# EAGLE board 13757_Sparkfun_Adjustable_LiPo_Charger.panel_v10 (EAGLE 7.5.0), part 1 of 3
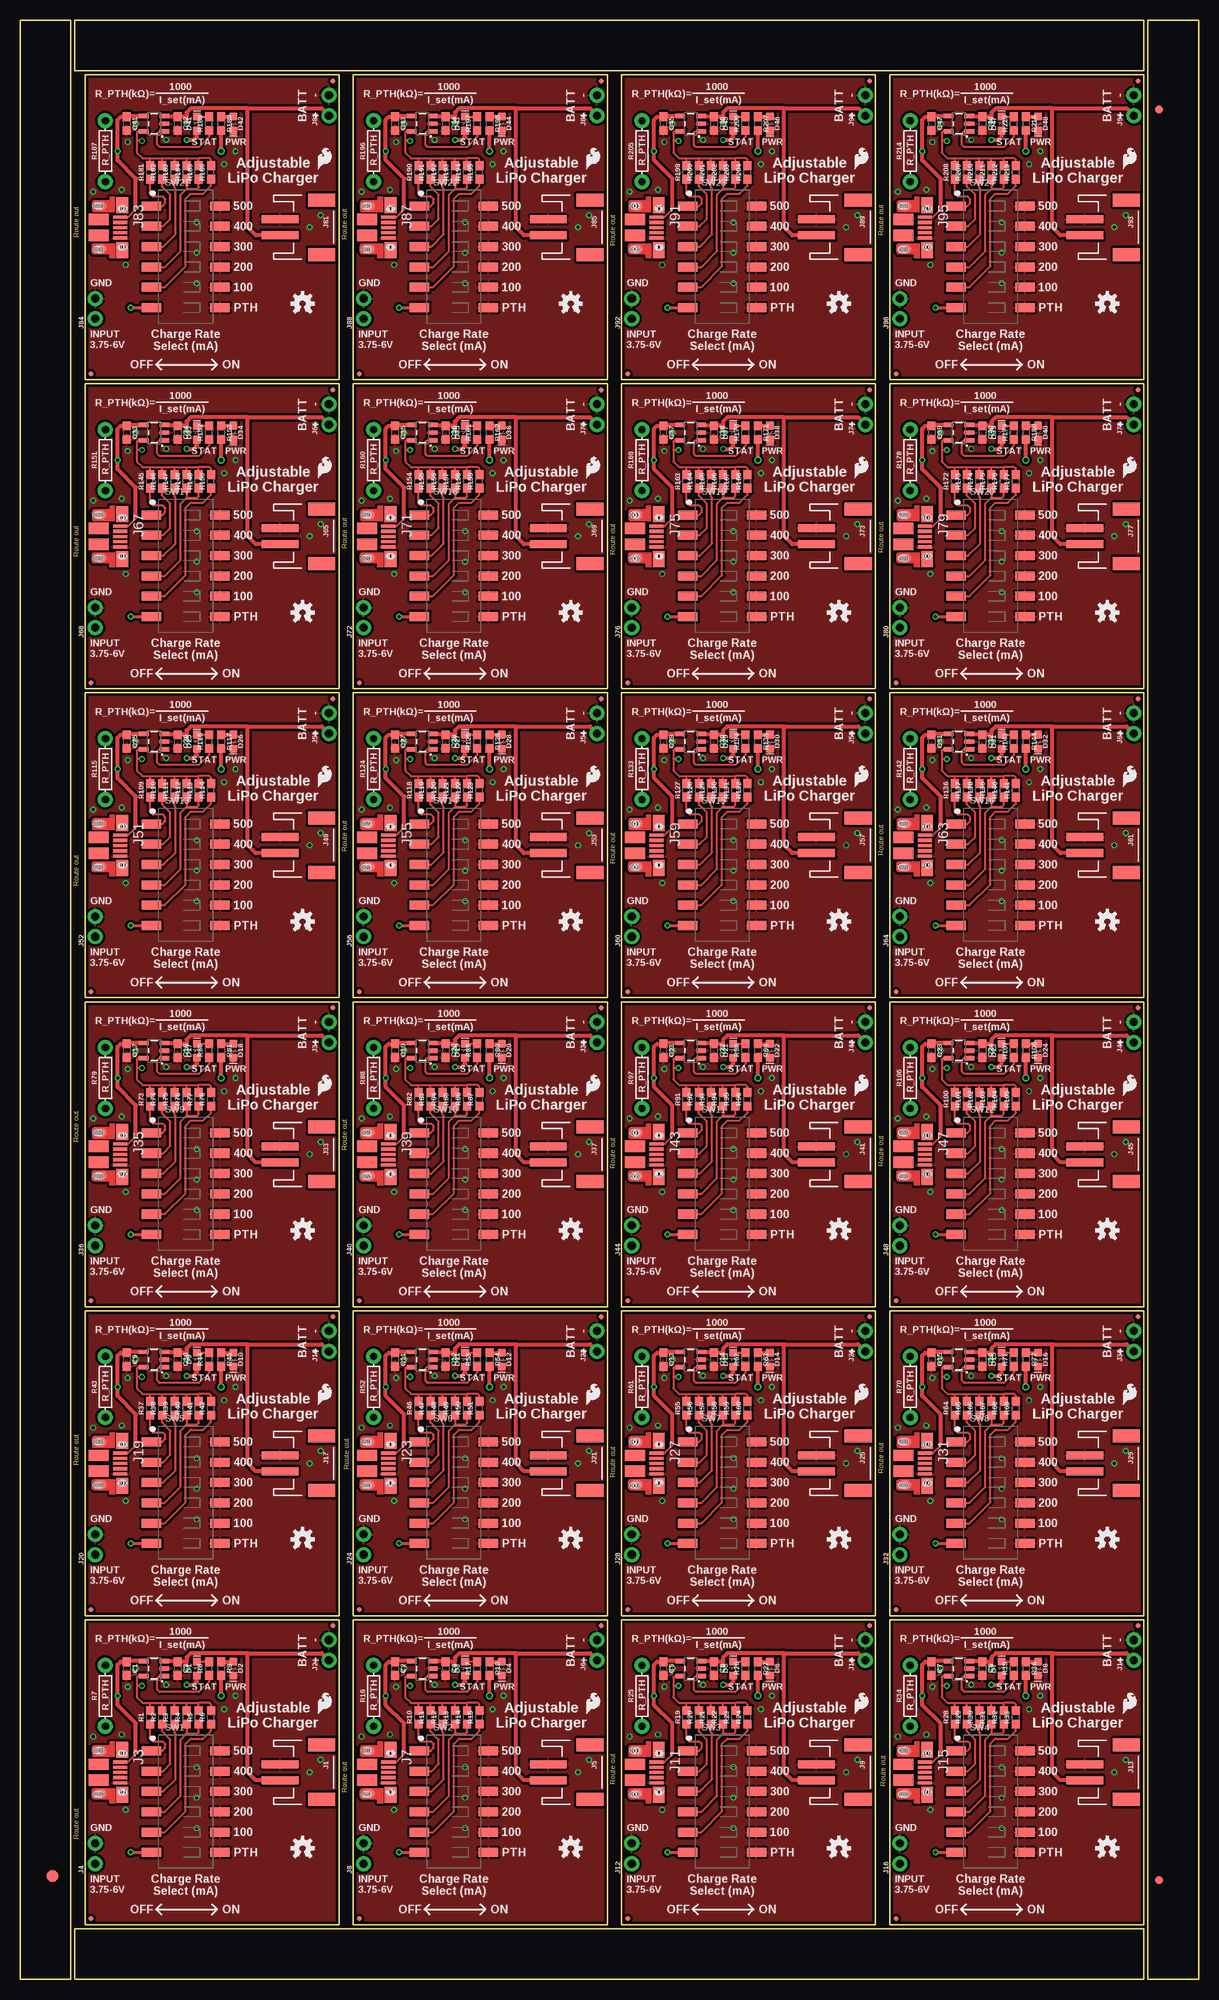
[diagram p0: board, top side]
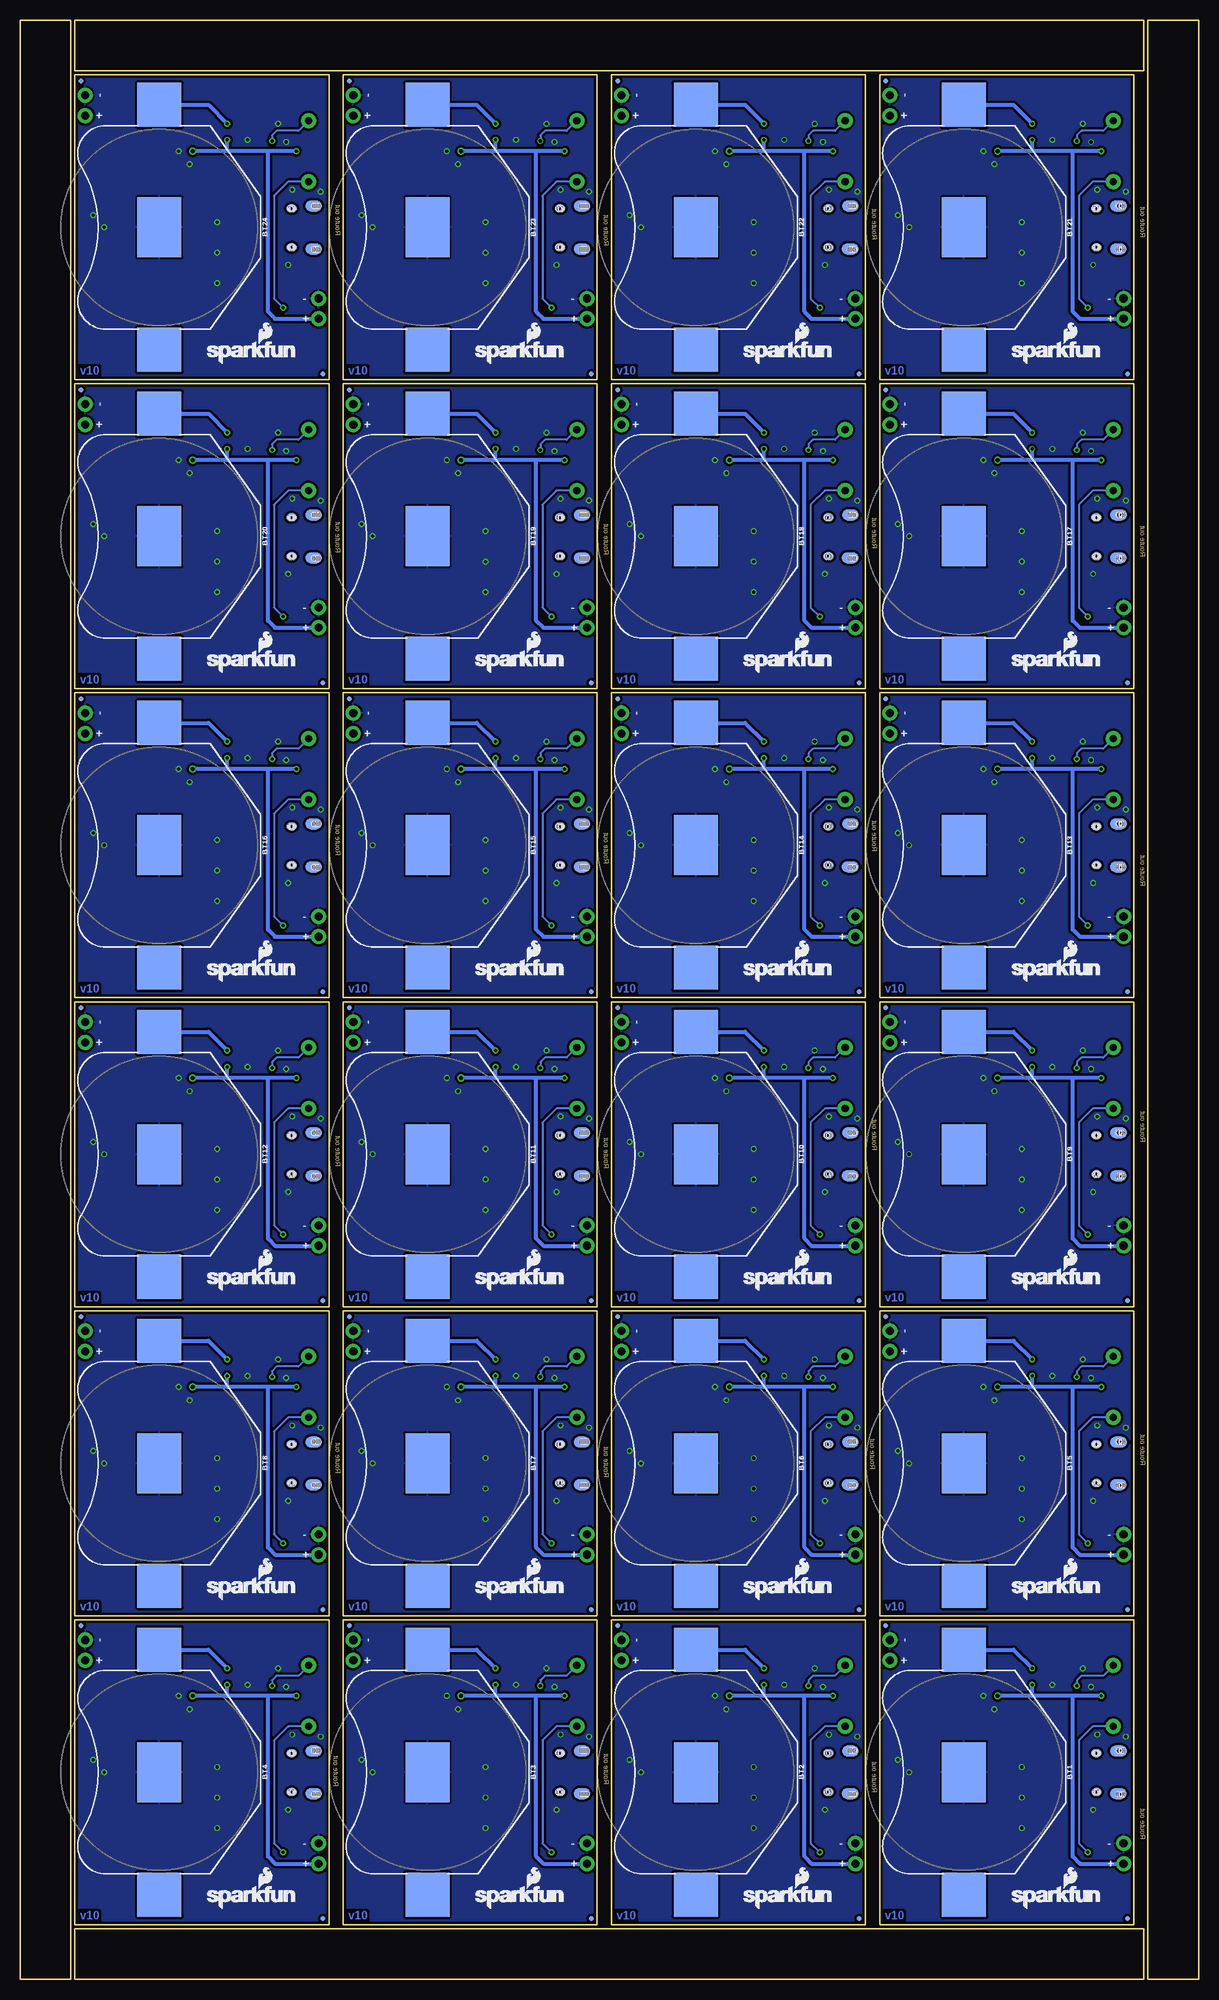
[diagram p1: board, bottom side, seen from below]

Size 147.32 x 244.86 mm. Coordinates in mm from the lower left corner, seen from the top.
Outline: 6.35,79.25 6.35,0 0,0 0,29.72
Outline: 0,27.18 0,244.86 6.35,244.86 6.35,76.71
Outline: 79.25,0 6.86,0 6.86,6.35 29.72,6.35
Outline: 27.18,6.35 140.46,6.35 140.46,0 76.71,0
Outline: 68.07,244.86 140.46,244.86 140.46,238.51 117.6,238.51
Outline: 120.14,238.51 6.86,238.51 6.86,244.86 70.61,244.86
Outline: 140.97,172.47 140.97,244.86 147.32,244.86 147.32,222
Outline: 147.32,224.54 147.32,0 140.97,0 140.97,175.01
Outline: 8.13,6.86 39.88,6.86 39.88,44.96 8.13,44.96 8.13,6.86
Outline: 41.66,6.86 73.41,6.86 73.41,44.96 41.66,44.96 41.66,6.86
Outline: 75.18,6.86 106.93,6.86 106.93,44.96 75.18,44.96 75.18,6.86
Outline: 108.71,6.86 140.46,6.86 140.46,44.96 108.71,44.96 108.71,6.86
Outline: 8.13,45.47 39.88,45.47 39.88,83.57 8.13,83.57 8.13,45.47
Outline: 41.66,45.47 73.41,45.47 73.41,83.57 41.66,83.57 41.66,45.47
Outline: 75.18,45.47 106.93,45.47 106.93,83.57 75.18,83.57 75.18,45.47
Outline: 108.71,45.47 140.46,45.47 140.46,83.57 108.71,83.57 108.71,45.47
Outline: 8.13,84.07 39.88,84.07 39.88,122.17 8.13,122.17 8.13,84.07
Outline: 41.66,84.07 73.41,84.07 73.41,122.17 41.66,122.17 41.66,84.07
Outline: 75.18,84.07 106.93,84.07 106.93,122.17 75.18,122.17 75.18,84.07
Outline: 108.71,84.07 140.46,84.07 140.46,122.17 108.71,122.17 108.71,84.07
Outline: 8.13,122.68 39.88,122.68 39.88,160.78 8.13,160.78 8.13,122.68
Outline: 41.66,122.68 73.41,122.68 73.41,160.78 41.66,160.78 41.66,122.68
Outline: 75.18,122.68 106.93,122.68 106.93,160.78 75.18,160.78 75.18,122.68
Outline: 108.71,122.68 140.46,122.68 140.46,160.78 108.71,160.78 108.71,122.68
Outline: 8.13,161.29 39.88,161.29 39.88,199.39 8.13,199.39 8.13,161.29
Outline: 41.66,161.29 73.41,161.29 73.41,199.39 41.66,199.39 41.66,161.29
Outline: 75.18,161.29 106.93,161.29 106.93,199.39 75.18,199.39 75.18,161.29
Outline: 108.71,161.29 140.46,161.29 140.46,199.39 108.71,199.39 108.71,161.29
Outline: 8.13,199.9 39.88,199.9 39.88,238 8.13,238 8.13,199.9
Outline: 41.66,199.9 73.41,199.9 73.41,238 41.66,238 41.66,199.9
Outline: 75.18,199.9 106.93,199.9 106.93,238 75.18,238 75.18,199.9
Outline: 108.71,199.9 140.46,199.9 140.46,238 108.71,238 108.71,199.9
Copper layers (1*16): Top 0.035mm / dielectric 1.5mm / Bottom 0.035mm
Design rules "SparkFun-2-layer-TIGHT": minimum track width 7mil, minimum drill 15mil, track to track 7mil, track to pad 7mil, pad to pad 7mil, via to via 7mil, smd to smd 7mil, copper to edge 7mil, drill to drill 7mil, minimum pad ring 7mil, minimum via ring 7mil, stop-mask expansion 4mil, vias tented up to drill 25mil, thermal gap 10mil

## Footprints (pad centres in the part's own frame; a part is rotated, then mirrored left to right if it is on the bottom)
BATTCON_24.5MM_SMD = smd 5.5 x 5.5: 1 -15.3,0; 3 15.3,0 | smd 7.5 x 5.5: 2 0,0
0603 = smd 1.1 x 1: 1 -0.85,0; 2 0.85,0
LED-0603 = smd 1 x 1: A -0.877,0; C 0.877,0
FIDUCIAL-1.5X3 = smd 1.5 x 1.5: 1 0,0
FIDUCIAL-1X2 = smd 1 x 1: 1 0,0
FIDUCIAL-MICRO = smd 0.635 x 0.635: 1 0,0
JST-2-SMD = smd 1 x 4.6: 1 -1,-3.7; 2 1,-3.7 | smd 1.6 x 3.4: NC1 -3.4,1.5; NC2 3.4,1.5
1X02_NO_SILK = drill 1.016 pad 1.88: 1 0,0; 2 2.54,0
USB-MICROB-PTH = smd 0.4 x 1.75: D+ 0.031,1.331; D- -0.619,1.331; GND 1.331,1.331; ID 0.681,1.331; VBUS -1.269,1.331 | smd 1.4 x 2.1 bottom: P$1 2.701,-1.142; P$3 -2.659,-1.144 | smd 1 x 1.3: P$2 2.487,1.594; P$6 -2.368,1.604 | smd 1 x 1.3 bottom: P$4 -2.368,1.604; P$10 2.481,1.598 | smd 1.1 x 1.5: P$8 2.701,-1.142; P$12 -2.659,-1.144 | smd 2 x 1.46: SHEILD2 2.831,1.606; SHIELD -2.794,1.606 | smd 1.425 x 2.5: SHIELD3 -0.979,-1.349; SHIELD4 0.996,-1.352 | hole 0.7: -2.693,-1.134; -2.693,-1.3; -2.694,-1.499; -2.694,-1.664; 2.768,-1.134; 2.767,-1.303; 2.766,-1.496; 2.766,-1.664 | hole 0.66: -2.359,1.821; -2.349,1.691; -2.359,1.541; -2.354,1.432; 2.481,1.821; 2.491,1.691; 2.481,1.541; 2.486,1.432
AXIAL-0.3 = drill 0.9 pad 1.88: P$1 -3.81,0; P$2 3.81,0
DIPSWITCH-06-SMD = smd 1.13 x 2.44: 1 -6.35,-4.3; 2 -3.81,-4.3; 3 -1.27,-4.3; 4 1.27,-4.3; 5 3.81,-4.3; 6 6.35,-4.3; 7 6.35,4.3; 8 3.81,4.3; 9 1.27,4.3; 10 -1.27,4.3; 11 -3.81,4.3; 12 -6.35,4.3
SOT23-5 = smd 0.55 x 1.2: 1 -0.95,-1.3; 2 0,-1.3; 3 0.95,-1.3; 4 0.95,1.3; 5 -0.95,1.3

## Placement (x,y rotation side)
BT1  [BATTCON_24.5MM_SMD]  29.34,25.91 90 bottom
BT2  [BATTCON_24.5MM_SMD]  62.87,25.91 90 bottom
BT3  [BATTCON_24.5MM_SMD]  96.39,25.91 90 bottom
BT4  [BATTCON_24.5MM_SMD]  129.92,25.91 90 bottom
BT5  [BATTCON_24.5MM_SMD]  29.34,64.52 90 bottom
BT6  [BATTCON_24.5MM_SMD]  62.87,64.52 90 bottom
BT7  [BATTCON_24.5MM_SMD]  96.39,64.52 90 bottom
BT8  [BATTCON_24.5MM_SMD]  129.92,64.52 90 bottom
BT9  [BATTCON_24.5MM_SMD]  29.34,103.12 90 bottom
BT10  [BATTCON_24.5MM_SMD]  62.87,103.12 90 bottom
BT11  [BATTCON_24.5MM_SMD]  96.39,103.12 90 bottom
BT12  [BATTCON_24.5MM_SMD]  129.92,103.12 90 bottom
BT13  [BATTCON_24.5MM_SMD]  29.34,141.73 90 bottom
BT14  [BATTCON_24.5MM_SMD]  62.87,141.73 90 bottom
BT15  [BATTCON_24.5MM_SMD]  96.39,141.73 90 bottom
BT16  [BATTCON_24.5MM_SMD]  129.92,141.73 90 bottom
BT17  [BATTCON_24.5MM_SMD]  29.34,180.34 90 bottom
BT18  [BATTCON_24.5MM_SMD]  62.87,180.34 90 bottom
BT19  [BATTCON_24.5MM_SMD]  96.39,180.34 90 bottom
BT20  [BATTCON_24.5MM_SMD]  129.92,180.34 90 bottom
BT21  [BATTCON_24.5MM_SMD]  29.34,218.95 90 bottom
BT22  [BATTCON_24.5MM_SMD]  62.87,218.95 90 bottom
BT23  [BATTCON_24.5MM_SMD]  96.39,218.95 90 bottom
BT24  [BATTCON_24.5MM_SMD]  129.92,218.95 90 bottom
C1  4.7uF  [0603]  13.34,38.86 270 top
C2  4.7uF  [0603]  46.86,38.86 270 top
C3  4.7uF  [0603]  19.68,38.86 270 top
C4  4.7uF  [0603]  53.21,38.86 270 top
C5  4.7uF  [0603]  80.39,38.86 270 top
C6  4.7uF  [0603]  86.74,38.86 270 top
C7  4.7uF  [0603]  113.92,38.86 270 top
C8  4.7uF  [0603]  120.27,38.86 270 top
C9  4.7uF  [0603]  13.34,77.47 270 top
C10  4.7uF  [0603]  19.68,77.47 270 top
C11  4.7uF  [0603]  46.86,77.47 270 top
C12  4.7uF  [0603]  53.21,77.47 270 top
C13  4.7uF  [0603]  80.39,77.47 270 top
C14  4.7uF  [0603]  86.74,77.47 270 top
C15  4.7uF  [0603]  113.92,77.47 270 top
C16  4.7uF  [0603]  120.27,77.47 270 top
C17  4.7uF  [0603]  13.34,116.08 270 top
C18  4.7uF  [0603]  19.68,116.08 270 top
C19  4.7uF  [0603]  46.86,116.08 270 top
C20  4.7uF  [0603]  53.21,116.08 270 top
C21  4.7uF  [0603]  80.39,116.08 270 top
C22  4.7uF  [0603]  86.74,116.08 270 top
C23  4.7uF  [0603]  113.92,116.08 270 top
C24  4.7uF  [0603]  120.27,116.08 270 top
C25  4.7uF  [0603]  13.34,154.69 270 top
C26  4.7uF  [0603]  19.68,154.69 270 top
C27  4.7uF  [0603]  46.86,154.69 270 top
C28  4.7uF  [0603]  53.21,154.69 270 top
C29  4.7uF  [0603]  80.39,154.69 270 top
C30  4.7uF  [0603]  86.74,154.69 270 top
C31  4.7uF  [0603]  113.92,154.69 270 top
C32  4.7uF  [0603]  120.27,154.69 270 top
C33  4.7uF  [0603]  13.34,193.29 270 top
C34  4.7uF  [0603]  19.68,193.29 270 top
C35  4.7uF  [0603]  46.86,193.29 270 top
C36  4.7uF  [0603]  53.21,193.29 270 top
C37  4.7uF  [0603]  80.39,193.29 270 top
C38  4.7uF  [0603]  86.74,193.29 270 top
C39  4.7uF  [0603]  113.92,193.29 270 top
C40  4.7uF  [0603]  120.27,193.29 270 top
C41  4.7uF  [0603]  13.34,231.9 270 top
C42  4.7uF  [0603]  19.68,231.9 270 top
C43  4.7uF  [0603]  46.86,231.9 270 top
C44  4.7uF  [0603]  53.21,231.9 270 top
C45  4.7uF  [0603]  80.39,231.9 270 top
C46  4.7uF  [0603]  86.74,231.9 270 top
C47  4.7uF  [0603]  113.92,231.9 270 top
C48  4.7uF  [0603]  120.27,231.9 270 top
D1  BLUE  [LED-0603]  22.1,38.86 90 top
D2  RED  [LED-0603]  26.67,38.86 270 top
D3  BLUE  [LED-0603]  55.63,38.86 90 top
D4  RED  [LED-0603]  60.2,38.86 270 top
D5  BLUE  [LED-0603]  89.15,38.86 90 top
D6  RED  [LED-0603]  93.73,38.86 270 top
D7  BLUE  [LED-0603]  122.68,38.86 90 top
D8  RED  [LED-0603]  127.25,38.86 270 top
D9  BLUE  [LED-0603]  22.1,77.47 90 top
D10  RED  [LED-0603]  26.67,77.47 270 top
D11  BLUE  [LED-0603]  55.63,77.47 90 top
D12  RED  [LED-0603]  60.2,77.47 270 top
D13  BLUE  [LED-0603]  89.15,77.47 90 top
D14  RED  [LED-0603]  93.73,77.47 270 top
D15  BLUE  [LED-0603]  122.68,77.47 90 top
D16  RED  [LED-0603]  127.25,77.47 270 top
D17  BLUE  [LED-0603]  22.1,116.08 90 top
D18  RED  [LED-0603]  26.67,116.08 270 top
D19  BLUE  [LED-0603]  55.63,116.08 90 top
D20  RED  [LED-0603]  60.2,116.08 270 top
D21  BLUE  [LED-0603]  89.15,116.08 90 top
D22  RED  [LED-0603]  93.73,116.08 270 top
D23  BLUE  [LED-0603]  122.68,116.08 90 top
D24  RED  [LED-0603]  127.25,116.08 270 top
D25  BLUE  [LED-0603]  22.1,154.69 90 top
D26  RED  [LED-0603]  26.67,154.69 270 top
D27  BLUE  [LED-0603]  55.63,154.69 90 top
D28  RED  [LED-0603]  60.2,154.69 270 top
D29  BLUE  [LED-0603]  89.15,154.69 90 top
D30  RED  [LED-0603]  93.73,154.69 270 top
D31  BLUE  [LED-0603]  122.68,154.69 90 top
D32  RED  [LED-0603]  127.25,154.69 270 top
D33  BLUE  [LED-0603]  22.1,193.29 90 top
D34  RED  [LED-0603]  26.67,193.29 270 top
D35  BLUE  [LED-0603]  55.63,193.29 90 top
D36  RED  [LED-0603]  60.2,193.29 270 top
D37  BLUE  [LED-0603]  89.15,193.29 90 top
D38  RED  [LED-0603]  93.73,193.29 270 top
D39  BLUE  [LED-0603]  122.68,193.29 90 top
D40  RED  [LED-0603]  127.25,193.29 270 top
D41  BLUE  [LED-0603]  22.1,231.9 90 top
D42  RED  [LED-0603]  26.67,231.9 270 top
D43  BLUE  [LED-0603]  55.63,231.9 90 top
D44  RED  [LED-0603]  60.2,231.9 270 top
D45  BLUE  [LED-0603]  89.15,231.9 90 top
D46  RED  [LED-0603]  93.73,231.9 270 top
D47  BLUE  [LED-0603]  122.68,231.9 90 top
D48  RED  [LED-0603]  127.25,231.9 270 top
E$1  [FIDUCIAL-1.5X3]  4.06,12.95 0 top
E$7  [FIDUCIAL-1X2]  142.37,233.68 180 top
E$8  [FIDUCIAL-1X2]  142.37,12.45 0 top
FD1  FIDUCIALUFIDUCIAL  [FIDUCIAL-MICRO]  39.12,44.2 0 top
FD2  FIDUCIALUFIDUCIAL  [FIDUCIAL-MICRO]  8.89,7.62 0 top
FD3  FIDUCIALUFIDUCIAL  [FIDUCIAL-MICRO]  8.89,7.62 0 bottom
FD4  FIDUCIALUFIDUCIAL  [FIDUCIAL-MICRO]  39.12,44.2 0 bottom
FD5  FIDUCIALUFIDUCIAL  [FIDUCIAL-MICRO]  72.64,44.2 0 top
FD6  FIDUCIALUFIDUCIAL  [FIDUCIAL-MICRO]  42.42,7.62 0 top
FD7  FIDUCIALUFIDUCIAL  [FIDUCIAL-MICRO]  42.42,7.62 0 bottom
FD8  FIDUCIALUFIDUCIAL  [FIDUCIAL-MICRO]  72.64,44.2 0 bottom
FD9  FIDUCIALUFIDUCIAL  [FIDUCIAL-MICRO]  106.17,44.2 0 top
FD10  FIDUCIALUFIDUCIAL  [FIDUCIAL-MICRO]  75.95,7.62 0 top
FD11  FIDUCIALUFIDUCIAL  [FIDUCIAL-MICRO]  75.95,7.62 0 bottom
FD12  FIDUCIALUFIDUCIAL  [FIDUCIAL-MICRO]  106.17,44.2 0 bottom
FD13  FIDUCIALUFIDUCIAL  [FIDUCIAL-MICRO]  139.7,44.2 0 top
FD14  FIDUCIALUFIDUCIAL  [FIDUCIAL-MICRO]  109.47,7.62 0 top
FD15  FIDUCIALUFIDUCIAL  [FIDUCIAL-MICRO]  109.47,7.62 0 bottom
FD16  FIDUCIALUFIDUCIAL  [FIDUCIAL-MICRO]  139.7,44.2 0 bottom
FD17  FIDUCIALUFIDUCIAL  [FIDUCIAL-MICRO]  39.12,82.8 0 top
FD18  FIDUCIALUFIDUCIAL  [FIDUCIAL-MICRO]  8.89,46.23 0 top
FD19  FIDUCIALUFIDUCIAL  [FIDUCIAL-MICRO]  8.89,46.23 0 bottom
FD20  FIDUCIALUFIDUCIAL  [FIDUCIAL-MICRO]  39.12,82.8 0 bottom
FD21  FIDUCIALUFIDUCIAL  [FIDUCIAL-MICRO]  72.64,82.8 0 top
FD22  FIDUCIALUFIDUCIAL  [FIDUCIAL-MICRO]  42.42,46.23 0 top
FD23  FIDUCIALUFIDUCIAL  [FIDUCIAL-MICRO]  42.42,46.23 0 bottom
FD24  FIDUCIALUFIDUCIAL  [FIDUCIAL-MICRO]  72.64,82.8 0 bottom
FD25  FIDUCIALUFIDUCIAL  [FIDUCIAL-MICRO]  106.17,82.8 0 top
FD26  FIDUCIALUFIDUCIAL  [FIDUCIAL-MICRO]  75.95,46.23 0 top
FD27  FIDUCIALUFIDUCIAL  [FIDUCIAL-MICRO]  75.95,46.23 0 bottom
FD28  FIDUCIALUFIDUCIAL  [FIDUCIAL-MICRO]  106.17,82.8 0 bottom
FD29  FIDUCIALUFIDUCIAL  [FIDUCIAL-MICRO]  139.7,82.8 0 top
FD30  FIDUCIALUFIDUCIAL  [FIDUCIAL-MICRO]  109.47,46.23 0 top
FD31  FIDUCIALUFIDUCIAL  [FIDUCIAL-MICRO]  109.47,46.23 0 bottom
FD32  FIDUCIALUFIDUCIAL  [FIDUCIAL-MICRO]  139.7,82.8 0 bottom
FD33  FIDUCIALUFIDUCIAL  [FIDUCIAL-MICRO]  39.12,121.41 0 top
FD34  FIDUCIALUFIDUCIAL  [FIDUCIAL-MICRO]  8.89,84.84 0 top
FD35  FIDUCIALUFIDUCIAL  [FIDUCIAL-MICRO]  8.89,84.84 0 bottom
FD36  FIDUCIALUFIDUCIAL  [FIDUCIAL-MICRO]  39.12,121.41 0 bottom
FD37  FIDUCIALUFIDUCIAL  [FIDUCIAL-MICRO]  72.64,121.41 0 top
FD38  FIDUCIALUFIDUCIAL  [FIDUCIAL-MICRO]  42.42,84.84 0 top
FD39  FIDUCIALUFIDUCIAL  [FIDUCIAL-MICRO]  42.42,84.84 0 bottom
FD40  FIDUCIALUFIDUCIAL  [FIDUCIAL-MICRO]  72.64,121.41 0 bottom
FD41  FIDUCIALUFIDUCIAL  [FIDUCIAL-MICRO]  106.17,121.41 0 top
FD42  FIDUCIALUFIDUCIAL  [FIDUCIAL-MICRO]  75.95,84.84 0 top
FD43  FIDUCIALUFIDUCIAL  [FIDUCIAL-MICRO]  75.95,84.84 0 bottom
FD44  FIDUCIALUFIDUCIAL  [FIDUCIAL-MICRO]  106.17,121.41 0 bottom
FD45  FIDUCIALUFIDUCIAL  [FIDUCIAL-MICRO]  139.7,121.41 0 top
FD46  FIDUCIALUFIDUCIAL  [FIDUCIAL-MICRO]  109.47,84.84 0 top
FD47  FIDUCIALUFIDUCIAL  [FIDUCIAL-MICRO]  109.47,84.84 0 bottom
FD48  FIDUCIALUFIDUCIAL  [FIDUCIAL-MICRO]  139.7,121.41 0 bottom
FD49  FIDUCIALUFIDUCIAL  [FIDUCIAL-MICRO]  39.12,160.02 0 top
FD50  FIDUCIALUFIDUCIAL  [FIDUCIAL-MICRO]  8.89,123.44 0 top
FD51  FIDUCIALUFIDUCIAL  [FIDUCIAL-MICRO]  8.89,123.44 0 bottom
FD52  FIDUCIALUFIDUCIAL  [FIDUCIAL-MICRO]  39.12,160.02 0 bottom
FD53  FIDUCIALUFIDUCIAL  [FIDUCIAL-MICRO]  72.64,160.02 0 top
FD54  FIDUCIALUFIDUCIAL  [FIDUCIAL-MICRO]  42.42,123.44 0 top
FD55  FIDUCIALUFIDUCIAL  [FIDUCIAL-MICRO]  42.42,123.44 0 bottom
FD56  FIDUCIALUFIDUCIAL  [FIDUCIAL-MICRO]  72.64,160.02 0 bottom
FD57  FIDUCIALUFIDUCIAL  [FIDUCIAL-MICRO]  106.17,160.02 0 top
FD58  FIDUCIALUFIDUCIAL  [FIDUCIAL-MICRO]  75.95,123.44 0 top
FD59  FIDUCIALUFIDUCIAL  [FIDUCIAL-MICRO]  75.95,123.44 0 bottom
FD60  FIDUCIALUFIDUCIAL  [FIDUCIAL-MICRO]  106.17,160.02 0 bottom
FD61  FIDUCIALUFIDUCIAL  [FIDUCIAL-MICRO]  139.7,160.02 0 top
FD62  FIDUCIALUFIDUCIAL  [FIDUCIAL-MICRO]  109.47,123.44 0 top
FD63  FIDUCIALUFIDUCIAL  [FIDUCIAL-MICRO]  109.47,123.44 0 bottom
FD64  FIDUCIALUFIDUCIAL  [FIDUCIAL-MICRO]  139.7,160.02 0 bottom
FD65  FIDUCIALUFIDUCIAL  [FIDUCIAL-MICRO]  39.12,198.63 0 top
FD66  FIDUCIALUFIDUCIAL  [FIDUCIAL-MICRO]  8.89,162.05 0 top
FD67  FIDUCIALUFIDUCIAL  [FIDUCIAL-MICRO]  8.89,162.05 0 bottom
FD68  FIDUCIALUFIDUCIAL  [FIDUCIAL-MICRO]  39.12,198.63 0 bottom
FD69  FIDUCIALUFIDUCIAL  [FIDUCIAL-MICRO]  72.64,198.63 0 top
FD70  FIDUCIALUFIDUCIAL  [FIDUCIAL-MICRO]  42.42,162.05 0 top
FD71  FIDUCIALUFIDUCIAL  [FIDUCIAL-MICRO]  42.42,162.05 0 bottom
FD72  FIDUCIALUFIDUCIAL  [FIDUCIAL-MICRO]  72.64,198.63 0 bottom
FD73  FIDUCIALUFIDUCIAL  [FIDUCIAL-MICRO]  106.17,198.63 0 top
FD74  FIDUCIALUFIDUCIAL  [FIDUCIAL-MICRO]  75.95,162.05 0 top
FD75  FIDUCIALUFIDUCIAL  [FIDUCIAL-MICRO]  75.95,162.05 0 bottom
FD76  FIDUCIALUFIDUCIAL  [FIDUCIAL-MICRO]  106.17,198.63 0 bottom
FD77  FIDUCIALUFIDUCIAL  [FIDUCIAL-MICRO]  139.7,198.63 0 top
FD78  FIDUCIALUFIDUCIAL  [FIDUCIAL-MICRO]  109.47,162.05 0 top
FD79  FIDUCIALUFIDUCIAL  [FIDUCIAL-MICRO]  109.47,162.05 0 bottom
FD80  FIDUCIALUFIDUCIAL  [FIDUCIAL-MICRO]  139.7,198.63 0 bottom
FD81  FIDUCIALUFIDUCIAL  [FIDUCIAL-MICRO]  39.12,237.24 0 top
FD82  FIDUCIALUFIDUCIAL  [FIDUCIAL-MICRO]  8.89,200.66 0 top
FD83  FIDUCIALUFIDUCIAL  [FIDUCIAL-MICRO]  8.89,200.66 0 bottom
FD84  FIDUCIALUFIDUCIAL  [FIDUCIAL-MICRO]  39.12,237.24 0 bottom
FD85  FIDUCIALUFIDUCIAL  [FIDUCIAL-MICRO]  72.64,237.24 0 top
FD86  FIDUCIALUFIDUCIAL  [FIDUCIAL-MICRO]  42.42,200.66 0 top
FD87  FIDUCIALUFIDUCIAL  [FIDUCIAL-MICRO]  42.42,200.66 0 bottom
FD88  FIDUCIALUFIDUCIAL  [FIDUCIAL-MICRO]  72.64,237.24 0 bottom
FD89  FIDUCIALUFIDUCIAL  [FIDUCIAL-MICRO]  106.17,237.24 0 top
FD90  FIDUCIALUFIDUCIAL  [FIDUCIAL-MICRO]  75.95,200.66 0 top
FD91  FIDUCIALUFIDUCIAL  [FIDUCIAL-MICRO]  75.95,200.66 0 bottom
FD92  FIDUCIALUFIDUCIAL  [FIDUCIAL-MICRO]  106.17,237.24 0 bottom
FD93  FIDUCIALUFIDUCIAL  [FIDUCIAL-MICRO]  139.7,237.24 0 top
FD94  FIDUCIALUFIDUCIAL  [FIDUCIAL-MICRO]  109.47,200.66 0 top
FD95  FIDUCIALUFIDUCIAL  [FIDUCIAL-MICRO]  109.47,200.66 0 bottom
FD96  FIDUCIALUFIDUCIAL  [FIDUCIAL-MICRO]  139.7,237.24 0 bottom
J1  [JST-2-SMD]  36.2,25.91 270 top
J2  [1X02_NO_SILK]  38.61,39.88 90 top
J3  [USB-MICROB-PTH]  11.18,25.91 270 top
J4  [1X02_NO_SILK]  9.4,14.48 90 top
J5  [JST-2-SMD]  69.72,25.91 270 top
J6  [1X02_NO_SILK]  72.14,39.88 90 top
J7  [USB-MICROB-PTH]  44.7,25.91 270 top
J8  [1X02_NO_SILK]  42.93,14.48 90 top
J9  [JST-2-SMD]  103.25,25.91 270 top
J10  [1X02_NO_SILK]  105.66,39.88 90 top
J11  [USB-MICROB-PTH]  78.23,25.91 270 top
J12  [1X02_NO_SILK]  76.45,14.48 90 top
J13  [JST-2-SMD]  136.78,25.91 270 top
J14  [1X02_NO_SILK]  139.19,39.88 90 top
J15  [USB-MICROB-PTH]  111.76,25.91 270 top
J16  [1X02_NO_SILK]  109.98,14.48 90 top
J17  [JST-2-SMD]  36.2,64.52 270 top
J18  [1X02_NO_SILK]  38.61,78.49 90 top
J19  [USB-MICROB-PTH]  11.18,64.52 270 top
J20  [1X02_NO_SILK]  9.4,53.09 90 top
J21  [JST-2-SMD]  69.72,64.52 270 top
J22  [1X02_NO_SILK]  72.14,78.49 90 top
J23  [USB-MICROB-PTH]  44.7,64.52 270 top
J24  [1X02_NO_SILK]  42.93,53.09 90 top
J25  [JST-2-SMD]  103.25,64.52 270 top
J26  [1X02_NO_SILK]  105.66,78.49 90 top
J27  [USB-MICROB-PTH]  78.23,64.52 270 top
J28  [1X02_NO_SILK]  76.45,53.09 90 top
J29  [JST-2-SMD]  136.78,64.52 270 top
J30  [1X02_NO_SILK]  139.19,78.49 90 top
J31  [USB-MICROB-PTH]  111.76,64.52 270 top
J32  [1X02_NO_SILK]  109.98,53.09 90 top
J33  [JST-2-SMD]  36.2,103.12 270 top
J34  [1X02_NO_SILK]  38.61,117.09 90 top
J35  [USB-MICROB-PTH]  11.18,103.12 270 top
J36  [1X02_NO_SILK]  9.4,91.69 90 top
J37  [JST-2-SMD]  69.72,103.12 270 top
J38  [1X02_NO_SILK]  72.14,117.09 90 top
J39  [USB-MICROB-PTH]  44.7,103.12 270 top
J40  [1X02_NO_SILK]  42.93,91.69 90 top
J41  [JST-2-SMD]  103.25,103.12 270 top
J42  [1X02_NO_SILK]  105.66,117.09 90 top
J43  [USB-MICROB-PTH]  78.23,103.12 270 top
J44  [1X02_NO_SILK]  76.45,91.69 90 top
J45  [JST-2-SMD]  136.78,103.12 270 top
J46  [1X02_NO_SILK]  139.19,117.09 90 top
J47  [USB-MICROB-PTH]  111.76,103.12 270 top
J48  [1X02_NO_SILK]  109.98,91.69 90 top
J49  [JST-2-SMD]  36.2,141.73 270 top
J50  [1X02_NO_SILK]  38.61,155.7 90 top
J51  [USB-MICROB-PTH]  11.18,141.73 270 top
J52  [1X02_NO_SILK]  9.4,130.3 90 top
J53  [JST-2-SMD]  69.72,141.73 270 top
J54  [1X02_NO_SILK]  72.14,155.7 90 top
J55  [USB-MICROB-PTH]  44.7,141.73 270 top
J56  [1X02_NO_SILK]  42.93,130.3 90 top
J57  [JST-2-SMD]  103.25,141.73 270 top
J58  [1X02_NO_SILK]  105.66,155.7 90 top
J59  [USB-MICROB-PTH]  78.23,141.73 270 top
J60  [1X02_NO_SILK]  76.45,130.3 90 top
J61  [JST-2-SMD]  136.78,141.73 270 top
J62  [1X02_NO_SILK]  139.19,155.7 90 top
J63  [USB-MICROB-PTH]  111.76,141.73 270 top
J64  [1X02_NO_SILK]  109.98,130.3 90 top
J65  [JST-2-SMD]  36.2,180.34 270 top
J66  [1X02_NO_SILK]  38.61,194.31 90 top
J67  [USB-MICROB-PTH]  11.18,180.34 270 top
J68  [1X02_NO_SILK]  9.4,168.91 90 top
J69  [JST-2-SMD]  69.72,180.34 270 top
J70  [1X02_NO_SILK]  72.14,194.31 90 top
J71  [USB-MICROB-PTH]  44.7,180.34 270 top
J72  [1X02_NO_SILK]  42.93,168.91 90 top
J73  [JST-2-SMD]  103.25,180.34 270 top
J74  [1X02_NO_SILK]  105.66,194.31 90 top
J75  [USB-MICROB-PTH]  78.23,180.34 270 top
J76  [1X02_NO_SILK]  76.45,168.91 90 top
J77  [JST-2-SMD]  136.78,180.34 270 top
J78  [1X02_NO_SILK]  139.19,194.31 90 top
J79  [USB-MICROB-PTH]  111.76,180.34 270 top
J80  [1X02_NO_SILK]  109.98,168.91 90 top
J81  [JST-2-SMD]  36.2,218.95 270 top
J82  [1X02_NO_SILK]  38.61,232.92 90 top
J83  [USB-MICROB-PTH]  11.18,218.95 270 top
J84  [1X02_NO_SILK]  9.4,207.52 90 top
J85  [JST-2-SMD]  69.72,218.95 270 top
J86  [1X02_NO_SILK]  72.14,232.92 90 top
J87  [USB-MICROB-PTH]  44.7,218.95 270 top
J88  [1X02_NO_SILK]  42.93,207.52 90 top
J89  [JST-2-SMD]  103.25,218.95 270 top
J90  [1X02_NO_SILK]  105.66,232.92 90 top
J91  [USB-MICROB-PTH]  78.23,218.95 270 top
J92  [1X02_NO_SILK]  76.45,207.52 90 top
J93  [JST-2-SMD]  136.78,218.95 270 top
J94  [1X02_NO_SILK]  139.19,232.92 90 top
J95  [USB-MICROB-PTH]  111.76,218.95 270 top
J96  [1X02_NO_SILK]  109.98,207.52 90 top
LOGO1  SFE_LOGO_FLAME.1_INCH  [SFE_LOGO_FLAME_.1]  36.96,32.89 0 top
LOGO2  OSHW-LOGOS  [OSHW-LOGO-S]  35.31,16.38 0 top
LOGO3  SFE_LOGO_FLAME.1_INCH  [SFE_LOGO_FLAME_.1]  70.48,32.89 0 top
LOGO4  OSHW-LOGOS  [OSHW-LOGO-S]  68.83,16.38 0 top
LOGO5  SFE_LOGO_FLAME.1_INCH  [SFE_LOGO_FLAME_.1]  104.01,32.89 0 top
LOGO6  OSHW-LOGOS  [OSHW-LOGO-S]  102.36,16.38 0 top
LOGO7  SFE_LOGO_FLAME.1_INCH  [SFE_LOGO_FLAME_.1]  137.54,32.89 0 top
LOGO8  OSHW-LOGOS  [OSHW-LOGO-S]  135.89,16.38 0 top
LOGO9  SFE_LOGO_FLAME.1_INCH  [SFE_LOGO_FLAME_.1]  36.96,71.5 0 top
LOGO10  OSHW-LOGOS  [OSHW-LOGO-S]  35.31,54.99 0 top
LOGO11  SFE_LOGO_FLAME.1_INCH  [SFE_LOGO_FLAME_.1]  70.48,71.5 0 top
LOGO12  OSHW-LOGOS  [OSHW-LOGO-S]  68.83,54.99 0 top
LOGO13  SFE_LOGO_FLAME.1_INCH  [SFE_LOGO_FLAME_.1]  104.01,71.5 0 top
LOGO14  OSHW-LOGOS  [OSHW-LOGO-S]  102.36,54.99 0 top
LOGO15  SFE_LOGO_FLAME.1_INCH  [SFE_LOGO_FLAME_.1]  137.54,71.5 0 top
LOGO16  OSHW-LOGOS  [OSHW-LOGO-S]  135.89,54.99 0 top
LOGO17  SFE_LOGO_FLAME.1_INCH  [SFE_LOGO_FLAME_.1]  36.96,110.11 0 top
LOGO18  OSHW-LOGOS  [OSHW-LOGO-S]  35.31,93.6 0 top
LOGO19  SFE_LOGO_FLAME.1_INCH  [SFE_LOGO_FLAME_.1]  70.48,110.11 0 top
LOGO20  OSHW-LOGOS  [OSHW-LOGO-S]  68.83,93.6 0 top
LOGO21  SFE_LOGO_FLAME.1_INCH  [SFE_LOGO_FLAME_.1]  104.01,110.11 0 top
LOGO22  OSHW-LOGOS  [OSHW-LOGO-S]  102.36,93.6 0 top
LOGO23  SFE_LOGO_FLAME.1_INCH  [SFE_LOGO_FLAME_.1]  137.54,110.11 0 top
LOGO24  OSHW-LOGOS  [OSHW-LOGO-S]  135.89,93.6 0 top
LOGO25  SFE_LOGO_FLAME.1_INCH  [SFE_LOGO_FLAME_.1]  36.96,148.72 0 top
LOGO26  OSHW-LOGOS  [OSHW-LOGO-S]  35.31,132.21 0 top
LOGO27  SFE_LOGO_FLAME.1_INCH  [SFE_LOGO_FLAME_.1]  70.48,148.72 0 top
LOGO28  OSHW-LOGOS  [OSHW-LOGO-S]  68.83,132.21 0 top
LOGO29  SFE_LOGO_FLAME.1_INCH  [SFE_LOGO_FLAME_.1]  104.01,148.72 0 top
LOGO30  OSHW-LOGOS  [OSHW-LOGO-S]  102.36,132.21 0 top
LOGO31  SFE_LOGO_FLAME.1_INCH  [SFE_LOGO_FLAME_.1]  137.54,148.72 0 top
LOGO32  OSHW-LOGOS  [OSHW-LOGO-S]  135.89,132.21 0 top
LOGO33  SFE_LOGO_FLAME.1_INCH  [SFE_LOGO_FLAME_.1]  36.96,187.32 0 top
LOGO34  OSHW-LOGOS  [OSHW-LOGO-S]  35.31,170.81 0 top
LOGO35  SFE_LOGO_FLAME.1_INCH  [SFE_LOGO_FLAME_.1]  70.48,187.32 0 top
LOGO36  OSHW-LOGOS  [OSHW-LOGO-S]  68.83,170.81 0 top
LOGO37  SFE_LOGO_FLAME.1_INCH  [SFE_LOGO_FLAME_.1]  104.01,187.32 0 top
LOGO38  OSHW-LOGOS  [OSHW-LOGO-S]  102.36,170.81 0 top
LOGO39  SFE_LOGO_FLAME.1_INCH  [SFE_LOGO_FLAME_.1]  137.54,187.32 0 top
LOGO40  OSHW-LOGOS  [OSHW-LOGO-S]  135.89,170.81 0 top
LOGO41  SFE_LOGO_FLAME.1_INCH  [SFE_LOGO_FLAME_.1]  36.96,225.93 0 top
LOGO42  OSHW-LOGOS  [OSHW-LOGO-S]  35.31,209.42 0 top
LOGO43  SFE_LOGO_FLAME.1_INCH  [SFE_LOGO_FLAME_.1]  70.48,225.93 0 top
LOGO44  OSHW-LOGOS  [OSHW-LOGO-S]  68.83,209.42 0 top
LOGO45  SFE_LOGO_FLAME.1_INCH  [SFE_LOGO_FLAME_.1]  104.01,225.93 0 top
LOGO46  OSHW-LOGOS  [OSHW-LOGO-S]  102.36,209.42 0 top
LOGO47  SFE_LOGO_FLAME.1_INCH  [SFE_LOGO_FLAME_.1]  137.54,225.93 0 top
LOGO48  OSHW-LOGOS  [OSHW-LOGO-S]  135.89,209.42 0 top
R1  2.0k  [0603]  16.26,32.77 90 top
R2  2.49k  [0603]  17.78,32.77 90 top
R3  3.3k  [0603]  19.3,32.77 90 top
R4  10k  [0603]  20.83,32.77 90 top
R5  10k  [0603]  22.35,32.77 90 top
R6  10k  [0603]  23.88,32.77 90 top
R7  PTH  [AXIAL-0.3]  10.67,35.43 90 top
R8  330  [0603]  23.62,38.86 90 top
R9  470  [0603]  25.15,38.86 270 top
R10  2.0k  [0603]  49.78,32.77 90 top
R11  2.49k  [0603]  51.31,32.77 90 top
R12  3.3k  [0603]  52.83,32.77 90 top
R13  10k  [0603]  54.36,32.77 90 top
R14  10k  [0603]  55.88,32.77 90 top
R15  10k  [0603]  57.4,32.77 90 top
R16  PTH  [AXIAL-0.3]  44.2,35.43 90 top
R17  330  [0603]  57.15,38.86 90 top
R18  470  [0603]  58.67,38.86 270 top
R19  2.0k  [0603]  83.31,32.77 90 top
R20  2.49k  [0603]  84.84,32.77 90 top
R21  3.3k  [0603]  86.36,32.77 90 top
R22  10k  [0603]  87.88,32.77 90 top
R23  10k  [0603]  89.41,32.77 90 top
R24  10k  [0603]  90.93,32.77 90 top
R25  PTH  [AXIAL-0.3]  77.72,35.43 90 top
R26  330  [0603]  90.68,38.86 90 top
R27  470  [0603]  92.2,38.86 270 top
R28  2.0k  [0603]  116.84,32.77 90 top
R29  2.49k  [0603]  118.36,32.77 90 top
R30  3.3k  [0603]  119.89,32.77 90 top
R31  10k  [0603]  121.41,32.77 90 top
R32  10k  [0603]  122.94,32.77 90 top
R33  10k  [0603]  124.46,32.77 90 top
R34  PTH  [AXIAL-0.3]  111.25,35.43 90 top
R35  330  [0603]  124.21,38.86 90 top
R36  470  [0603]  125.73,38.86 270 top
R37  2.0k  [0603]  16.26,71.37 90 top
R38  2.49k  [0603]  17.78,71.37 90 top
R39  3.3k  [0603]  19.3,71.37 90 top
R40  10k  [0603]  20.83,71.37 90 top
R41  10k  [0603]  22.35,71.37 90 top
R42  10k  [0603]  23.88,71.37 90 top
R43  PTH  [AXIAL-0.3]  10.67,74.04 90 top
R44  330  [0603]  23.62,77.47 90 top
R45  470  [0603]  25.15,77.47 270 top
R46  2.0k  [0603]  49.78,71.37 90 top
R47  2.49k  [0603]  51.31,71.37 90 top
R48  3.3k  [0603]  52.83,71.37 90 top
R49  10k  [0603]  54.36,71.37 90 top
R50  10k  [0603]  55.88,71.37 90 top
R51  10k  [0603]  57.4,71.37 90 top
R52  PTH  [AXIAL-0.3]  44.2,74.04 90 top
R53  330  [0603]  57.15,77.47 90 top
R54  470  [0603]  58.67,77.47 270 top
R55  2.0k  [0603]  83.31,71.37 90 top
R56  2.49k  [0603]  84.84,71.37 90 top
R57  3.3k  [0603]  86.36,71.37 90 top
R58  10k  [0603]  87.88,71.37 90 top
R59  10k  [0603]  89.41,71.37 90 top
R60  10k  [0603]  90.93,71.37 90 top
R61  PTH  [AXIAL-0.3]  77.72,74.04 90 top
R62  330  [0603]  90.68,77.47 90 top
R63  470  [0603]  92.2,77.47 270 top
R64  2.0k  [0603]  116.84,71.37 90 top
R65  2.49k  [0603]  118.36,71.37 90 top
R66  3.3k  [0603]  119.89,71.37 90 top
R67  10k  [0603]  121.41,71.37 90 top
R68  10k  [0603]  122.94,71.37 90 top
R69  10k  [0603]  124.46,71.37 90 top
R70  PTH  [AXIAL-0.3]  111.25,74.04 90 top
R71  330  [0603]  124.21,77.47 90 top
R72  470  [0603]  125.73,77.47 270 top
R73  2.0k  [0603]  16.26,109.98 90 top
R74  2.49k  [0603]  17.78,109.98 90 top
R75  3.3k  [0603]  19.3,109.98 90 top
R76  10k  [0603]  20.83,109.98 90 top
R77  10k  [0603]  22.35,109.98 90 top
R78  10k  [0603]  23.88,109.98 90 top
R79  PTH  [AXIAL-0.3]  10.67,112.65 90 top
R80  330  [0603]  23.62,116.08 90 top
R81  470  [0603]  25.15,116.08 270 top
R82  2.0k  [0603]  49.78,109.98 90 top
R83  2.49k  [0603]  51.31,109.98 90 top
R84  3.3k  [0603]  52.83,109.98 90 top
R85  10k  [0603]  54.36,109.98 90 top
R86  10k  [0603]  55.88,109.98 90 top
R87  10k  [0603]  57.4,109.98 90 top
R88  PTH  [AXIAL-0.3]  44.2,112.65 90 top
R89  330  [0603]  57.15,116.08 90 top
R90  470  [0603]  58.67,116.08 270 top
R91  2.0k  [0603]  83.31,109.98 90 top
R92  2.49k  [0603]  84.84,109.98 90 top
R93  3.3k  [0603]  86.36,109.98 90 top
R94  10k  [0603]  87.88,109.98 90 top
R95  10k  [0603]  89.41,109.98 90 top
R96  10k  [0603]  90.93,109.98 90 top
R97  PTH  [AXIAL-0.3]  77.72,112.65 90 top
R98  330  [0603]  90.68,116.08 90 top
R99  470  [0603]  92.2,116.08 270 top
R100  2.0k  [0603]  116.84,109.98 90 top
R101  2.49k  [0603]  118.36,109.98 90 top
R102  3.3k  [0603]  119.89,109.98 90 top
R103  10k  [0603]  121.41,109.98 90 top
R104  10k  [0603]  122.94,109.98 90 top
R105  10k  [0603]  124.46,109.98 90 top
R106  PTH  [AXIAL-0.3]  111.25,112.65 90 top
R107  330  [0603]  124.21,116.08 90 top
R108  470  [0603]  125.73,116.08 270 top
R109  2.0k  [0603]  16.26,148.59 90 top
R110  2.49k  [0603]  17.78,148.59 90 top
R111  3.3k  [0603]  19.3,148.59 90 top
R112  10k  [0603]  20.83,148.59 90 top
R113  10k  [0603]  22.35,148.59 90 top
R114  10k  [0603]  23.88,148.59 90 top
R115  PTH  [AXIAL-0.3]  10.67,151.26 90 top
R116  330  [0603]  23.62,154.69 90 top
R117  470  [0603]  25.15,154.69 270 top
R118  2.0k  [0603]  49.78,148.59 90 top
R119  2.49k  [0603]  51.31,148.59 90 top
R120  3.3k  [0603]  52.83,148.59 90 top
R121  10k  [0603]  54.36,148.59 90 top
R122  10k  [0603]  55.88,148.59 90 top
R123  10k  [0603]  57.4,148.59 90 top
R124  PTH  [AXIAL-0.3]  44.2,151.26 90 top
R125  330  [0603]  57.15,154.69 90 top
R126  470  [0603]  58.67,154.69 270 top
R127  2.0k  [0603]  83.31,148.59 90 top
R128  2.49k  [0603]  84.84,148.59 90 top
R129  3.3k  [0603]  86.36,148.59 90 top
R130  10k  [0603]  87.88,148.59 90 top
R131  10k  [0603]  89.41,148.59 90 top
R132  10k  [0603]  90.93,148.59 90 top
R133  PTH  [AXIAL-0.3]  77.72,151.26 90 top
R134  330  [0603]  90.68,154.69 90 top
R135  470  [0603]  92.2,154.69 270 top
R136  2.0k  [0603]  116.84,148.59 90 top
R137  2.49k  [0603]  118.36,148.59 90 top
R138  3.3k  [0603]  119.89,148.59 90 top
R139  10k  [0603]  121.41,148.59 90 top
R140  10k  [0603]  122.94,148.59 90 top
R141  10k  [0603]  124.46,148.59 90 top
R142  PTH  [AXIAL-0.3]  111.25,151.26 90 top
R143  330  [0603]  124.21,154.69 90 top
R144  470  [0603]  125.73,154.69 270 top
R145  2.0k  [0603]  16.26,187.2 90 top
R146  2.49k  [0603]  17.78,187.2 90 top
R147  3.3k  [0603]  19.3,187.2 90 top
R148  10k  [0603]  20.83,187.2 90 top
R149  10k  [0603]  22.35,187.2 90 top
R150  10k  [0603]  23.88,187.2 90 top
R151  PTH  [AXIAL-0.3]  10.67,189.87 90 top
R152  330  [0603]  23.62,193.29 90 top
R153  470  [0603]  25.15,193.29 270 top
R154  2.0k  [0603]  49.78,187.2 90 top
R155  2.49k  [0603]  51.31,187.2 90 top
R156  3.3k  [0603]  52.83,187.2 90 top
R157  10k  [0603]  54.36,187.2 90 top
R158  10k  [0603]  55.88,187.2 90 top
R159  10k  [0603]  57.4,187.2 90 top
R160  PTH  [AXIAL-0.3]  44.2,189.87 90 top
R161  330  [0603]  57.15,193.29 90 top
R162  470  [0603]  58.67,193.29 270 top
R163  2.0k  [0603]  83.31,187.2 90 top
R164  2.49k  [0603]  84.84,187.2 90 top
R165  3.3k  [0603]  86.36,187.2 90 top
R166  10k  [0603]  87.88,187.2 90 top
R167  10k  [0603]  89.41,187.2 90 top
R168  10k  [0603]  90.93,187.2 90 top
R169  PTH  [AXIAL-0.3]  77.72,189.87 90 top
R170  330  [0603]  90.68,193.29 90 top
R171  470  [0603]  92.2,193.29 270 top
R172  2.0k  [0603]  116.84,187.2 90 top
R173  2.49k  [0603]  118.36,187.2 90 top
R174  3.3k  [0603]  119.89,187.2 90 top
R175  10k  [0603]  121.41,187.2 90 top
R176  10k  [0603]  122.94,187.2 90 top
R177  10k  [0603]  124.46,187.2 90 top
R178  PTH  [AXIAL-0.3]  111.25,189.87 90 top
R179  330  [0603]  124.21,193.29 90 top
R180  470  [0603]  125.73,193.29 270 top
R181  2.0k  [0603]  16.26,225.81 90 top
R182  2.49k  [0603]  17.78,225.81 90 top
R183  3.3k  [0603]  19.3,225.81 90 top
R184  10k  [0603]  20.83,225.81 90 top
R185  10k  [0603]  22.35,225.81 90 top
R186  10k  [0603]  23.88,225.81 90 top
R187  PTH  [AXIAL-0.3]  10.67,228.47 90 top
R188  330  [0603]  23.62,231.9 90 top
R189  470  [0603]  25.15,231.9 270 top
R190  2.0k  [0603]  49.78,225.81 90 top
R191  2.49k  [0603]  51.31,225.81 90 top
R192  3.3k  [0603]  52.83,225.81 90 top
R193  10k  [0603]  54.36,225.81 90 top
R194  10k  [0603]  55.88,225.81 90 top
R195  10k  [0603]  57.4,225.81 90 top
R196  PTH  [AXIAL-0.3]  44.2,228.47 90 top
R197  330  [0603]  57.15,231.9 90 top
R198  470  [0603]  58.67,231.9 270 top
R199  2.0k  [0603]  83.31,225.81 90 top
R200  2.49k  [0603]  84.84,225.81 90 top
R201  3.3k  [0603]  86.36,225.81 90 top
R202  10k  [0603]  87.88,225.81 90 top
R203  10k  [0603]  89.41,225.81 90 top
R204  10k  [0603]  90.93,225.81 90 top
R205  PTH  [AXIAL-0.3]  77.72,228.47 90 top
R206  330  [0603]  90.68,231.9 90 top
R207  470  [0603]  92.2,231.9 270 top
R208  2.0k  [0603]  116.84,225.81 90 top
R209  2.49k  [0603]  118.36,225.81 90 top
R210  3.3k  [0603]  119.89,225.81 90 top
R211  10k  [0603]  121.41,225.81 90 top
R212  10k  [0603]  122.94,225.81 90 top
R213  10k  [0603]  124.46,225.81 90 top
R214  PTH  [AXIAL-0.3]  111.25,228.47 90 top
R215  330  [0603]  124.21,231.9 90 top
R216  470  [0603]  125.73,231.9 270 top
SW1  DIP-06  [DIPSWITCH-06-SMD]  20.7,22.23 270 top
SW2  DIP-06  [DIPSWITCH-06-SMD]  54.23,22.23 270 top
SW3  DIP-06  [DIPSWITCH-06-SMD]  87.76,22.23 270 top
SW4  DIP-06  [DIPSWITCH-06-SMD]  121.28,22.23 270 top
SW5  DIP-06  [DIPSWITCH-06-SMD]  20.7,60.83 270 top
SW6  DIP-06  [DIPSWITCH-06-SMD]  54.23,60.83 270 top
SW7  DIP-06  [DIPSWITCH-06-SMD]  87.76,60.83 270 top
SW8  DIP-06  [DIPSWITCH-06-SMD]  121.28,60.83 270 top
SW9  DIP-06  [DIPSWITCH-06-SMD]  20.7,99.44 270 top
SW10  DIP-06  [DIPSWITCH-06-SMD]  54.23,99.44 270 top
SW11  DIP-06  [DIPSWITCH-06-SMD]  87.76,99.44 270 top
SW12  DIP-06  [DIPSWITCH-06-SMD]  121.28,99.44 270 top
SW13  DIP-06  [DIPSWITCH-06-SMD]  20.7,138.05 270 top
SW14  DIP-06  [DIPSWITCH-06-SMD]  54.23,138.05 270 top
SW15  DIP-06  [DIPSWITCH-06-SMD]  87.76,138.05 270 top
SW16  DIP-06  [DIPSWITCH-06-SMD]  121.28,138.05 270 top
SW17  DIP-06  [DIPSWITCH-06-SMD]  20.7,176.66 270 top
SW18  DIP-06  [DIPSWITCH-06-SMD]  54.23,176.66 270 top
SW19  DIP-06  [DIPSWITCH-06-SMD]  87.76,176.66 270 top
SW20  DIP-06  [DIPSWITCH-06-SMD]  121.28,176.66 270 top
SW21  DIP-06  [DIPSWITCH-06-SMD]  20.7,215.26 270 top
SW22  DIP-06  [DIPSWITCH-06-SMD]  54.23,215.26 270 top
SW23  DIP-06  [DIPSWITCH-06-SMD]  87.76,215.26 270 top
SW24  DIP-06  [DIPSWITCH-06-SMD]  121.28,215.26 270 top
U1  MCP73831  [SOT23-5]  16.76,38.86 90 top
U2  MCP73831  [SOT23-5]  50.29,38.86 90 top
U3  MCP73831  [SOT23-5]  83.82,38.86 90 top
U4  MCP73831  [SOT23-5]  117.35,38.86 90 top
U5  MCP73831  [SOT23-5]  16.76,77.47 90 top
U6  MCP73831  [SOT23-5]  50.29,77.47 90 top
U7  MCP73831  [SOT23-5]  83.82,77.47 90 top
U8  MCP73831  [SOT23-5]  117.35,77.47 90 top
U9  MCP73831  [SOT23-5]  16.76,116.08 90 top
U10  MCP73831  [SOT23-5]  50.29,116.08 90 top
U11  MCP73831  [SOT23-5]  83.82,116.08 90 top
U12  MCP73831  [SOT23-5]  117.35,116.08 90 top
U13  MCP73831  [SOT23-5]  16.76,154.69 90 top
U14  MCP73831  [SOT23-5]  50.29,154.69 90 top
U15  MCP73831  [SOT23-5]  83.82,154.69 90 top
U16  MCP73831  [SOT23-5]  117.35,154.69 90 top
U17  MCP73831  [SOT23-5]  16.76,193.29 90 top
U18  MCP73831  [SOT23-5]  50.29,193.29 90 top
U19  MCP73831  [SOT23-5]  83.82,193.29 90 top
U20  MCP73831  [SOT23-5]  117.35,193.29 90 top
U21  MCP73831  [SOT23-5]  16.76,231.9 90 top
U22  MCP73831  [SOT23-5]  50.29,231.9 90 top
U23  MCP73831  [SOT23-5]  83.82,231.9 90 top
U24  MCP73831  [SOT23-5]  117.35,231.9 90 top
U$1  [SFE_LOGO_NAME_FLAME_.1]  23.75,8.76 0 bottom
U$2  [SFE_LOGO_NAME_FLAME_.1]  57.28,8.76 0 bottom
U$3  [SFE_LOGO_NAME_FLAME_.1]  90.81,8.76 0 bottom
U$4  [SFE_LOGO_NAME_FLAME_.1]  124.33,8.76 0 bottom
U$5  [SFE_LOGO_NAME_FLAME_.1]  23.75,47.37 0 bottom
U$6  [SFE_LOGO_NAME_FLAME_.1]  57.28,47.37 0 bottom
U$7  [SFE_LOGO_NAME_FLAME_.1]  90.81,47.37 0 bottom
U$8  [SFE_LOGO_NAME_FLAME_.1]  124.33,47.37 0 bottom
U$9  [SFE_LOGO_NAME_FLAME_.1]  23.75,85.98 0 bottom
U$10  [SFE_LOGO_NAME_FLAME_.1]  57.28,85.98 0 bottom
U$11  [SFE_LOGO_NAME_FLAME_.1]  90.81,85.98 0 bottom
U$12  [SFE_LOGO_NAME_FLAME_.1]  124.33,85.98 0 bottom
U$13  [SFE_LOGO_NAME_FLAME_.1]  23.75,124.59 0 bottom
U$14  [SFE_LOGO_NAME_FLAME_.1]  57.28,124.59 0 bottom
U$15  [SFE_LOGO_NAME_FLAME_.1]  90.81,124.59 0 bottom
U$16  [SFE_LOGO_NAME_FLAME_.1]  124.33,124.59 0 bottom
U$17  [SFE_LOGO_NAME_FLAME_.1]  23.75,163.19 0 bottom
U$18  [SFE_LOGO_NAME_FLAME_.1]  57.28,163.19 0 bottom
U$19  [SFE_LOGO_NAME_FLAME_.1]  90.81,163.19 0 bottom
U$20  [SFE_LOGO_NAME_FLAME_.1]  124.33,163.19 0 bottom
U$21  [SFE_LOGO_NAME_FLAME_.1]  23.75,201.8 0 bottom
U$22  [SFE_LOGO_NAME_FLAME_.1]  57.28,201.8 0 bottom
U$23  [SFE_LOGO_NAME_FLAME_.1]  90.81,201.8 0 bottom
U$24  [SFE_LOGO_NAME_FLAME_.1]  124.33,201.8 0 bottom

## Library data of the parts
BT1-BT24 = SparkFun-Batteries; PROD_ID: PRT-13755
C1-C48 = SparkFun-Capacitors; PROD_ID: CAP-08280
D1 D3 D5 D7 D9 D11 D13 D15 D17 D19 D21 D23 D25 D27 D29 D31 D33 D35 D37 D39 D41 D43 D45 D47 = SparkFun-LED; PROD_ID: DIO-08575
D2 D4 D6 D8 D10 D12 D14 D16 D18 D20 D22 D24 D26 D28 D30 D32 D34 D36 D38 D40 D42 D44 D46 D48 = SparkFun-LED; PROD_ID: DIO-00819
E$1 = SparkFun-Retired
E$7 E$8 FD1-FD96 LOGO1-LOGO48 U$1-U$24 = SparkFun-Aesthetics
J1 J5 J9 J13 J17 J21 J25 J29 J33 J37 J41 J45 J49 J53 J57 J61 J65 J69 J73 J77 J81 J85 J89 J93 = SparkFun-Connectors; PROD_ID: CONN-11443; SF_ID: PRT-08612
J2 J4 J6 J8 J10 J12 J14 J16 J18 J20 J22 J24 J26 J28 J30 J32 J34 J36 J38 J40 J42 J44 J46 J48 J50 J52 J54 J56 J58 J60 J62 J64 J66 J68 J70 J72 J74 J76 J78 J80 J82 J84 J86 J88 J90 J92 J94 J96 = SparkFun-Connectors
J3 J7 J11 J15 J19 J23 J27 J31 J35 J39 J43 J47 J51 J55 J59 J63 J67 J71 J75 J79 J83 J87 J91 J95 = SparkFun-Connectors; PROD_ID: CONN-13711
R1 R10 R19 R28 R37 R46 R55 R64 R73 R82 R91 R100 R109 R118 R127 R136 R145 R154 R163 R172 R181 R190 R199 R208 = SparkFun-Resistors; PROD_ID: RES-08296
R2 R11 R20 R29 R38 R47 R56 R65 R74 R83 R92 R101 R110 R119 R128 R137 R146 R155 R164 R173 R182 R191 R200 R209 = SparkFun-Resistors; PROD_ID: RES-09568
R3 R12 R21 R30 R39 R48 R57 R66 R75 R84 R93 R102 R111 R120 R129 R138 R147 R156 R165 R174 R183 R192 R201 R210 = SparkFun-Resistors; PROD_ID: RES-07851
R4-R6 R13-R15 R22-R24 R31-R33 R40-R42 R49-R51 R58-R60 R67-R69 R76-R78 R85-R87 R94-R96 R103-R105 R112-R114 R121-R123 R130-R132 R139-R141 R148-R150 R157-R159 R166-R168 R175-R177 R184-R186 R193-R195 R202-R204 R211-R213 = SparkFun-Resistors; PROD_ID: RES-00824
R7 R16 R25 R34 R43 R52 R61 R70 R79 R88 R97 R106 R115 R124 R133 R142 R151 R160 R169 R178 R187 R196 R205 R214 = SparkFun-Resistors
R8 R17 R26 R35 R44 R53 R62 R71 R80 R89 R98 R107 R116 R125 R134 R143 R152 R161 R170 R179 R188 R197 R206 R215 = SparkFun-Resistors; PROD_ID: RES-00818
R9 R18 R27 R36 R45 R54 R63 R72 R81 R90 R99 R108 R117 R126 R135 R144 R153 R162 R171 R180 R189 R198 R207 R216 = SparkFun-Resistors; PROD_ID: RES-07869
SW1-SW24 = SparkFun-Switches; PROD_ID: SWCH-13756
U1-U24 = SparkFun-IC-Power; PROD_ID: IC-09995

## Nets
GND: BT1.2 C1.2 C3.2 D2.C J1.1 J2.2 J3.GND J4.2 SW1.7 SW1.8 SW1.9 SW1.10 SW1.11 SW1.12 U1.2
GND1: BT2.2 C2.2 C4.2 D4.C J5.1 J6.2 J7.GND J8.2 SW2.7 SW2.8 SW2.9 SW2.10 SW2.11 SW2.12 U2.2
GND2: BT3.2 C5.2 C6.2 D6.C J9.1 J10.2 J11.GND J12.2 SW3.7 SW3.8 SW3.9 SW3.10 SW3.11 SW3.12 U3.2
GND3: BT4.2 C7.2 C8.2 D8.C J13.1 J14.2 J15.GND J16.2 SW4.7 SW4.8 SW4.9 SW4.10 SW4.11 SW4.12 U4.2
GND4: BT5.2 C9.2 C10.2 D10.C J17.1 J18.2 J19.GND J20.2 SW5.7 SW5.8 SW5.9 SW5.10 SW5.11 SW5.12 U5.2
GND5: BT6.2 C11.2 C12.2 D12.C J21.1 J22.2 J23.GND J24.2 SW6.7 SW6.8 SW6.9 SW6.10 SW6.11 SW6.12 U6.2
GND6: BT7.2 C13.2 C14.2 D14.C J25.1 J26.2 J27.GND J28.2 SW7.7 SW7.8 SW7.9 SW7.10 SW7.11 SW7.12 U7.2
GND7: BT8.2 C15.2 C16.2 D16.C J29.1 J30.2 J31.GND J32.2 SW8.7 SW8.8 SW8.9 SW8.10 SW8.11 SW8.12 U8.2
GND8: BT9.2 C17.2 C18.2 D18.C J33.1 J34.2 J35.GND J36.2 SW9.7 SW9.8 SW9.9 SW9.10 SW9.11 SW9.12 U9.2
GND9: BT10.2 C19.2 C20.2 D20.C J37.1 J38.2 J39.GND J40.2 SW10.7 SW10.8 SW10.9 SW10.10 SW10.11 SW10.12 U10.2
GND10: BT11.2 C21.2 C22.2 D22.C J41.1 J42.2 J43.GND J44.2 SW11.7 SW11.8 SW11.9 SW11.10 SW11.11 SW11.12 U11.2
GND11: BT12.2 C23.2 C24.2 D24.C J45.1 J46.2 J47.GND J48.2 SW12.7 SW12.8 SW12.9 SW12.10 SW12.11 SW12.12 U12.2
GND12: BT13.2 C25.2 C26.2 D26.C J49.1 J50.2 J51.GND J52.2 SW13.7 SW13.8 SW13.9 SW13.10 SW13.11 SW13.12 U13.2
GND13: BT14.2 C27.2 C28.2 D28.C J53.1 J54.2 J55.GND J56.2 SW14.7 SW14.8 SW14.9 SW14.10 SW14.11 SW14.12 U14.2
GND14: BT15.2 C29.2 C30.2 D30.C J57.1 J58.2 J59.GND J60.2 SW15.7 SW15.8 SW15.9 SW15.10 SW15.11 SW15.12 U15.2
GND15: BT16.2 C31.2 C32.2 D32.C J61.1 J62.2 J63.GND J64.2 SW16.7 SW16.8 SW16.9 SW16.10 SW16.11 SW16.12 U16.2
GND16: BT17.2 C33.2 C34.2 D34.C J65.1 J66.2 J67.GND J68.2 SW17.7 SW17.8 SW17.9 SW17.10 SW17.11 SW17.12 U17.2
GND17: BT18.2 C35.2 C36.2 D36.C J69.1 J70.2 J71.GND J72.2 SW18.7 SW18.8 SW18.9 SW18.10 SW18.11 SW18.12 U18.2
GND18: BT19.2 C37.2 C38.2 D38.C J73.1 J74.2 J75.GND J76.2 SW19.7 SW19.8 SW19.9 SW19.10 SW19.11 SW19.12 U19.2
GND19: BT20.2 C39.2 C40.2 D40.C J77.1 J78.2 J79.GND J80.2 SW20.7 SW20.8 SW20.9 SW20.10 SW20.11 SW20.12 U20.2
GND20: BT21.2 C41.2 C42.2 D42.C J81.1 J82.2 J83.GND J84.2 SW21.7 SW21.8 SW21.9 SW21.10 SW21.11 SW21.12 U21.2
GND21: BT22.2 C43.2 C44.2 D44.C J85.1 J86.2 J87.GND J88.2 SW22.7 SW22.8 SW22.9 SW22.10 SW22.11 SW22.12 U22.2
GND22: BT23.2 C45.2 C46.2 D46.C J89.1 J90.2 J91.GND J92.2 SW23.7 SW23.8 SW23.9 SW23.10 SW23.11 SW23.12 U23.2
GND23: BT24.2 C47.2 C48.2 D48.C J93.1 J94.2 J95.GND J96.2 SW24.7 SW24.8 SW24.9 SW24.10 SW24.11 SW24.12 U24.2
N$1: R8.1 U1.1
N$2: R1.1 SW1.1
N$3: R2.1 SW1.2
N$4: R3.1 SW1.3
N$5: R4.1 R5.1 SW1.4
N$6: R6.1 SW1.5
N$7: R7.P$1 SW1.6
N$8: D1.C R8.2
N$9: R10.1 SW2.1
N$10: R11.1 SW2.2
N$11: R12.1 SW2.3
N$12: D2.A R9.1
N$13: R13.1 R14.1 SW2.4
N$14: R15.1 SW2.5
N$15: R16.P$1 SW2.6
N$16: R17.1 U2.1
N$17: D4.A R18.1
N$18: D3.C R17.2
N$19: R19.1 SW3.1
N$20: R20.1 SW3.2
N$21: R21.1 SW3.3
N$22: R22.1 R23.1 SW3.4
N$23: R24.1 SW3.5
N$24: R25.P$1 SW3.6
N$25: R26.1 U3.1
N$26: D6.A R27.1
N$27: D5.C R26.2
N$28: R28.1 SW4.1
N$29: R29.1 SW4.2
N$30: R30.1 SW4.3
N$31: R31.1 R32.1 SW4.4
N$32: R33.1 SW4.5
N$33: R34.P$1 SW4.6
N$34: R35.1 U4.1
N$35: D8.A R36.1
N$36: D7.C R35.2
N$37: R37.1 SW5.1
N$38: R38.1 SW5.2
N$39: R39.1 SW5.3
N$40: R40.1 R41.1 SW5.4
N$41: R42.1 SW5.5
N$42: R43.P$1 SW5.6
N$43: R44.1 U5.1
N$44: D10.A R45.1
N$45: D9.C R44.2
N$46: R46.1 SW6.1
N$47: R47.1 SW6.2
N$48: R48.1 SW6.3
N$49: R49.1 R50.1 SW6.4
N$50: R51.1 SW6.5
N$51: R52.P$1 SW6.6
N$52: R53.1 U6.1
N$53: D12.A R54.1
N$54: D11.C R53.2
N$55: R55.1 SW7.1
N$56: R56.1 SW7.2
N$57: R57.1 SW7.3
N$58: R58.1 R59.1 SW7.4
N$59: R60.1 SW7.5
N$60: R61.P$1 SW7.6
N$61: R62.1 U7.1
N$62: D14.A R63.1
N$63: D13.C R62.2
N$64: R64.1 SW8.1
N$65: R65.1 SW8.2
N$66: R66.1 SW8.3
N$67: R67.1 R68.1 SW8.4
N$68: R69.1 SW8.5
N$69: R70.P$1 SW8.6
N$70: R71.1 U8.1
N$71: D16.A R72.1
N$72: D15.C R71.2
N$73: R73.1 SW9.1
N$74: R74.1 SW9.2
N$75: R75.1 SW9.3
N$76: R76.1 R77.1 SW9.4
N$77: R78.1 SW9.5
N$78: R79.P$1 SW9.6
N$79: R80.1 U9.1
N$80: D18.A R81.1
N$81: D17.C R80.2
N$82: R82.1 SW10.1
N$83: R83.1 SW10.2
N$84: R84.1 SW10.3
N$85: R85.1 R86.1 SW10.4
N$86: R87.1 SW10.5
N$87: R88.P$1 SW10.6
N$88: R89.1 U10.1
N$89: D20.A R90.1
N$90: D19.C R89.2
N$91: R91.1 SW11.1
N$92: R92.1 SW11.2
N$93: R93.1 SW11.3
N$94: R94.1 R95.1 SW11.4
N$95: R96.1 SW11.5
N$96: R97.P$1 SW11.6
N$97: R98.1 U11.1
N$98: D22.A R99.1
N$99: D21.C R98.2
N$100: R100.1 SW12.1
N$101: R101.1 SW12.2
N$102: R102.1 SW12.3
N$103: R103.1 R104.1 SW12.4
N$104: R105.1 SW12.5
N$105: R106.P$1 SW12.6
N$106: R107.1 U12.1
N$107: D24.A R108.1
N$108: D23.C R107.2
N$109: R109.1 SW13.1
N$110: R110.1 SW13.2
N$111: R111.1 SW13.3
N$112: R112.1 R113.1 SW13.4
N$113: R114.1 SW13.5
N$114: R115.P$1 SW13.6
N$115: R116.1 U13.1
N$116: D26.A R117.1
N$117: D25.C R116.2
N$118: R118.1 SW14.1
N$119: R119.1 SW14.2
N$120: R120.1 SW14.3
N$121: R121.1 R122.1 SW14.4
N$122: R123.1 SW14.5
N$123: R124.P$1 SW14.6
N$124: R125.1 U14.1
N$125: D28.A R126.1
N$126: D27.C R125.2
N$127: R127.1 SW15.1
N$128: R128.1 SW15.2
N$129: R129.1 SW15.3
N$130: R130.1 R131.1 SW15.4
N$131: R132.1 SW15.5
N$132: R133.P$1 SW15.6
N$133: R134.1 U15.1
N$134: D30.A R135.1
N$135: D29.C R134.2
N$136: R136.1 SW16.1
N$137: R137.1 SW16.2
N$138: R138.1 SW16.3
N$139: R139.1 R140.1 SW16.4
N$140: R141.1 SW16.5
N$141: R142.P$1 SW16.6
N$142: R143.1 U16.1
N$143: D32.A R144.1
N$144: D31.C R143.2
N$145: R145.1 SW17.1
N$146: R146.1 SW17.2
N$147: R147.1 SW17.3
N$148: R148.1 R149.1 SW17.4
N$149: R150.1 SW17.5
N$150: R151.P$1 SW17.6
N$151: R152.1 U17.1
N$152: D34.A R153.1
N$153: D33.C R152.2
N$154: R154.1 SW18.1
N$155: R155.1 SW18.2
N$156: R156.1 SW18.3
N$157: R157.1 R158.1 SW18.4
N$158: R159.1 SW18.5
N$159: R160.P$1 SW18.6
N$160: R161.1 U18.1
N$161: D36.A R162.1
N$162: D35.C R161.2
N$163: R163.1 SW19.1
N$164: R164.1 SW19.2
N$165: R165.1 SW19.3
N$166: R166.1 R167.1 SW19.4
N$167: R168.1 SW19.5
N$168: R169.P$1 SW19.6
N$169: R170.1 U19.1
N$170: D38.A R171.1
N$171: D37.C R170.2
N$172: R172.1 SW20.1
N$173: R173.1 SW20.2
N$174: R174.1 SW20.3
N$175: R175.1 R176.1 SW20.4
N$176: R177.1 SW20.5
N$177: R178.P$1 SW20.6
N$178: R179.1 U20.1
N$179: D40.A R180.1
N$180: D39.C R179.2
N$181: R181.1 SW21.1
N$182: R182.1 SW21.2
N$183: R183.1 SW21.3
N$184: R184.1 R185.1 SW21.4
N$185: R186.1 SW21.5
N$186: R187.P$1 SW21.6
N$187: R188.1 U21.1
N$188: D42.A R189.1
N$189: D41.C R188.2
N$190: R190.1 SW22.1
N$191: R191.1 SW22.2
N$192: R192.1 SW22.3
N$193: R193.1 R194.1 SW22.4
N$194: R195.1 SW22.5
N$195: R196.P$1 SW22.6
N$196: R197.1 U22.1
N$197: D44.A R198.1
N$198: D43.C R197.2
N$199: R199.1 SW23.1
N$200: R200.1 SW23.2
N$201: R201.1 SW23.3
N$202: R202.1 R203.1 SW23.4
N$203: R204.1 SW23.5
N$204: R205.P$1 SW23.6
N$205: R206.1 U23.1
N$206: D46.A R207.1
N$207: D45.C R206.2
N$208: R208.1 SW24.1
N$209: R209.1 SW24.2
N$210: R210.1 SW24.3
N$211: R211.1 R212.1 SW24.4
N$212: R213.1 SW24.5
N$213: R214.P$1 SW24.6
N$214: R215.1 U24.1
N$215: D48.A R216.1
N$216: D47.C R215.2
PROG: R1.2 R2.2 R3.2 R4.2 R5.2 R6.2 R7.P$2 U1.5
PROG1: R10.2 R11.2 R12.2 R13.2 R14.2 R15.2 R16.P$2 U2.5
PROG2: R19.2 R20.2 R21.2 R22.2 R23.2 R24.2 R25.P$2 U3.5
PROG3: R28.2 R29.2 R30.2 R31.2 R32.2 R33.2 R34.P$2 U4.5
PROG4: R37.2 R38.2 R39.2 R40.2 R41.2 R42.2 R43.P$2 U5.5
PROG5: R46.2 R47.2 R48.2 R49.2 R50.2 R51.2 R52.P$2 U6.5
PROG6: R55.2 R56.2 R57.2 R58.2 R59.2 R60.2 R61.P$2 U7.5
PROG7: R64.2 R65.2 R66.2 R67.2 R68.2 R69.2 R70.P$2 U8.5
PROG8: R73.2 R74.2 R75.2 R76.2 R77.2 R78.2 R79.P$2 U9.5
PROG9: R82.2 R83.2 R84.2 R85.2 R86.2 R87.2 R88.P$2 U10.5
PROG10: R91.2 R92.2 R93.2 R94.2 R95.2 R96.2 R97.P$2 U11.5
PROG11: R100.2 R101.2 R102.2 R103.2 R104.2 R105.2 R106.P$2 U12.5
PROG12: R109.2 R110.2 R111.2 R112.2 R113.2 R114.2 R115.P$2 U13.5
PROG13: R118.2 R119.2 R120.2 R121.2 R122.2 R123.2 R124.P$2 U14.5
PROG14: R127.2 R128.2 R129.2 R130.2 R131.2 R132.2 R133.P$2 U15.5
PROG15: R136.2 R137.2 R138.2 R139.2 R140.2 R141.2 R142.P$2 U16.5
PROG16: R145.2 R146.2 R147.2 R148.2 R149.2 R150.2 R151.P$2 U17.5
PROG17: R154.2 R155.2 R156.2 R157.2 R158.2 R159.2 R160.P$2 U18.5
PROG18: R163.2 R164.2 R165.2 R166.2 R167.2 R168.2 R169.P$2 U19.5
PROG19: R172.2 R173.2 R174.2 R175.2 R176.2 R177.2 R178.P$2 U20.5
PROG20: R181.2 R182.2 R183.2 R184.2 R185.2 R186.2 R187.P$2 U21.5
PROG21: R190.2 R191.2 R192.2 R193.2 R194.2 R195.2 R196.P$2 U22.5
PROG22: R199.2 R200.2 R201.2 R202.2 R203.2 R204.2 R205.P$2 U23.5
PROG23: R208.2 R209.2 R210.2 R211.2 R212.2 R213.2 R214.P$2 U24.5
V_BATT: BT1.3 C3.1 J1.2 J2.1 U1.3
V_BATT1: BT2.3 C4.1 J5.2 J6.1 U2.3
V_BATT2: BT3.3 C6.1 J9.2 J10.1 U3.3
V_BATT3: BT4.3 C8.1 J13.2 J14.1 U4.3
V_BATT4: BT5.3 C10.1 J17.2 J18.1 U5.3
V_BATT5: BT6.3 C12.1 J21.2 J22.1 U6.3
V_BATT6: BT7.3 C14.1 J25.2 J26.1 U7.3
V_BATT7: BT8.3 C16.1 J29.2 J30.1 U8.3
V_BATT8: BT9.3 C18.1 J33.2 J34.1 U9.3
V_BATT9: BT10.3 C20.1 J37.2 J38.1 U10.3
V_BATT10: BT11.3 C22.1 J41.2 J42.1 U11.3
V_BATT11: BT12.3 C24.1 J45.2 J46.1 U12.3
V_BATT12: BT13.3 C26.1 J49.2 J50.1 U13.3
V_BATT13: BT14.3 C28.1 J53.2 J54.1 U14.3
V_BATT14: BT15.3 C30.1 J57.2 J58.1 U15.3
V_BATT15: BT16.3 C32.1 J61.2 J62.1 U16.3
V_BATT16: BT17.3 C34.1 J65.2 J66.1 U17.3
V_BATT17: BT18.3 C36.1 J69.2 J70.1 U18.3
V_BATT18: BT19.3 C38.1 J73.2 J74.1 U19.3
V_BATT19: BT20.3 C40.1 J77.2 J78.1 U20.3
V_BATT20: BT21.3 C42.1 J81.2 J82.1 U21.3
V_BATT21: BT22.3 C44.1 J85.2 J86.1 U22.3
V_BATT22: BT23.3 C46.1 J89.2 J90.1 U23.3
V_BATT23: BT24.3 C48.1 J93.2 J94.1 U24.3
VCC: C1.1 D1.A J3.VBUS J4.1 R9.2 U1.4
VCC1: C2.1 D3.A J7.VBUS J8.1 R18.2 U2.4
VCC2: C5.1 D5.A J11.VBUS J12.1 R27.2 U3.4
VCC3: C7.1 D7.A J15.VBUS J16.1 R36.2 U4.4
VCC4: C9.1 D9.A J19.VBUS J20.1 R45.2 U5.4
VCC5: C11.1 D11.A J23.VBUS J24.1 R54.2 U6.4
VCC6: C13.1 D13.A J27.VBUS J28.1 R63.2 U7.4
VCC7: C15.1 D15.A J31.VBUS J32.1 R72.2 U8.4
VCC8: C17.1 D17.A J35.VBUS J36.1 R81.2 U9.4
VCC9: C19.1 D19.A J39.VBUS J40.1 R90.2 U10.4
VCC10: C21.1 D21.A J43.VBUS J44.1 R99.2 U11.4
VCC11: C23.1 D23.A J47.VBUS J48.1 R108.2 U12.4
VCC12: C25.1 D25.A J51.VBUS J52.1 R117.2 U13.4
VCC13: C27.1 D27.A J55.VBUS J56.1 R126.2 U14.4
VCC14: C29.1 D29.A J59.VBUS J60.1 R135.2 U15.4
VCC15: C31.1 D31.A J63.VBUS J64.1 R144.2 U16.4
VCC16: C33.1 D33.A J67.VBUS J68.1 R153.2 U17.4
VCC17: C35.1 D35.A J71.VBUS J72.1 R162.2 U18.4
VCC18: C37.1 D37.A J75.VBUS J76.1 R171.2 U19.4
VCC19: C39.1 D39.A J79.VBUS J80.1 R180.2 U20.4
VCC20: C41.1 D41.A J83.VBUS J84.1 R189.2 U21.4
VCC21: C43.1 D43.A J87.VBUS J88.1 R198.2 U22.4
VCC22: C45.1 D45.A J91.VBUS J92.1 R207.2 U23.4
VCC23: C47.1 D47.A J95.VBUS J96.1 R216.2 U24.4

## Tracks (layer width: path | path; a pad name or v marks a point on that pad's centre or on a via)
GND  (via drill 0.38)
  other vias: 18.29,36.83 13.46,36.58 14.48,38.86 22.1,26.54 22.1,18.92 22.1,22.73 13.21,21.21 9.14,30.35 12.7,30.61 25.53,33.78 26.92,35.43 36.2,25.91 37.59,27.43
  pour Top (isolate 0.305): 8.13,44.96 39.88,44.96 39.88,6.86 8.13,6.86
  pour Bottom (isolate 0.305): 8.13,44.96 39.88,44.96 39.88,6.86 8.13,6.86
GND1  (via drill 0.38)
  other vias: 51.82,36.83 46.99,36.58 48.01,38.86 55.63,26.54 55.63,18.92 55.63,22.73 46.74,21.21 42.67,30.35 46.23,30.61 59.05,33.78 60.45,35.43 69.72,25.91 71.12,27.43
  pour Top (isolate 0.305): 41.66,44.96 73.41,44.96 73.41,6.86 41.66,6.86
  pour Bottom (isolate 0.305): 41.66,44.96 73.41,44.96 73.41,6.86 41.66,6.86
GND2  (via drill 0.38)
  other vias: 85.34,36.83 80.52,36.58 81.53,38.86 89.15,26.54 89.15,18.92 89.15,22.73 80.26,21.21 76.2,30.35 79.76,30.61 92.58,33.78 93.98,35.43 103.25,25.91 104.65,27.43
  pour Top (isolate 0.305): 75.18,44.96 106.93,44.96 106.93,6.86 75.18,6.86
  pour Bottom (isolate 0.305): 75.18,44.96 106.93,44.96 106.93,6.86 75.18,6.86
GND3  (via drill 0.38)
  other vias: 118.87,36.83 114.05,36.58 115.06,38.86 122.68,26.54 122.68,18.92 122.68,22.73 113.79,21.21 109.73,30.35 113.28,30.61 126.11,33.78 127.51,35.43 136.78,25.91 138.18,27.43
  pour Top (isolate 0.305): 108.71,44.96 140.46,44.96 140.46,6.86 108.71,6.86
  pour Bottom (isolate 0.305): 108.71,44.96 140.46,44.96 140.46,6.86 108.71,6.86
GND4  (via drill 0.38)
  other vias: 18.29,75.44 13.46,75.18 14.48,77.47 22.1,65.15 22.1,57.53 22.1,61.34 13.21,59.82 9.14,68.96 12.7,69.22 25.53,72.39 26.92,74.04 36.2,64.52 37.59,66.04
  pour Top (isolate 0.305): 8.13,83.57 39.88,83.57 39.88,45.47 8.13,45.47
  pour Bottom (isolate 0.305): 8.13,83.57 39.88,83.57 39.88,45.47 8.13,45.47
GND5  (via drill 0.38)
  other vias: 51.82,75.44 46.99,75.18 48.01,77.47 55.63,65.15 55.63,57.53 55.63,61.34 46.74,59.82 42.67,68.96 46.23,69.22 59.05,72.39 60.45,74.04 69.72,64.52 71.12,66.04
  pour Top (isolate 0.305): 41.66,83.57 73.41,83.57 73.41,45.47 41.66,45.47
  pour Bottom (isolate 0.305): 41.66,83.57 73.41,83.57 73.41,45.47 41.66,45.47
GND6  (via drill 0.38)
  other vias: 85.34,75.44 80.52,75.18 81.53,77.47 89.15,65.15 89.15,57.53 89.15,61.34 80.26,59.82 76.2,68.96 79.76,69.22 92.58,72.39 93.98,74.04 103.25,64.52 104.65,66.04
  pour Top (isolate 0.305): 75.18,83.57 106.93,83.57 106.93,45.47 75.18,45.47
  pour Bottom (isolate 0.305): 75.18,83.57 106.93,83.57 106.93,45.47 75.18,45.47
GND7  (via drill 0.38)
  other vias: 118.87,75.44 114.05,75.18 115.06,77.47 122.68,65.15 122.68,57.53 122.68,61.34 113.79,59.82 109.73,68.96 113.28,69.22 126.11,72.39 127.51,74.04 136.78,64.52 138.18,66.04
  pour Top (isolate 0.305): 108.71,83.57 140.46,83.57 140.46,45.47 108.71,45.47
  pour Bottom (isolate 0.305): 108.71,83.57 140.46,83.57 140.46,45.47 108.71,45.47
GND8  (via drill 0.38)
  other vias: 18.29,114.05 13.46,113.79 14.48,116.08 22.1,103.76 22.1,96.14 22.1,99.95 13.21,98.42 9.14,107.57 12.7,107.82 25.53,111 26.92,112.65 36.2,103.12 37.59,104.65
  pour Top (isolate 0.305): 8.13,122.17 39.88,122.17 39.88,84.07 8.13,84.07
  pour Bottom (isolate 0.305): 8.13,122.17 39.88,122.17 39.88,84.07 8.13,84.07
GND9  (via drill 0.38)
  other vias: 51.82,114.05 46.99,113.79 48.01,116.08 55.63,103.76 55.63,96.14 55.63,99.95 46.74,98.42 42.67,107.57 46.23,107.82 59.05,111 60.45,112.65 69.72,103.12 71.12,104.65
  pour Top (isolate 0.305): 41.66,122.17 73.41,122.17 73.41,84.07 41.66,84.07
  pour Bottom (isolate 0.305): 41.66,122.17 73.41,122.17 73.41,84.07 41.66,84.07
GND10  (via drill 0.38)
  other vias: 85.34,114.05 80.52,113.79 81.53,116.08 89.15,103.76 89.15,96.14 89.15,99.95 80.26,98.42 76.2,107.57 79.76,107.82 92.58,111 93.98,112.65 103.25,103.12 104.65,104.65
  pour Top (isolate 0.305): 75.18,122.17 106.93,122.17 106.93,84.07 75.18,84.07
  pour Bottom (isolate 0.305): 75.18,122.17 106.93,122.17 106.93,84.07 75.18,84.07
GND11  (via drill 0.38)
  other vias: 118.87,114.05 114.05,113.79 115.06,116.08 122.68,103.76 122.68,96.14 122.68,99.95 113.79,98.42 109.73,107.57 113.28,107.82 126.11,111 127.51,112.65 136.78,103.12 138.18,104.65
  pour Top (isolate 0.305): 108.71,122.17 140.46,122.17 140.46,84.07 108.71,84.07
  pour Bottom (isolate 0.305): 108.71,122.17 140.46,122.17 140.46,84.07 108.71,84.07
GND12  (via drill 0.38)